# EAGLE board clock (EAGLE 5.10)

Size 100 x 80 mm. Coordinates in mm from the lower left corner, seen from the top.
Outline: 0,0 100,0 100,80 0,80 0,0
Copper layers (1*16): Top 0.035mm / dielectric 1.5mm / Bottom 0.035mm
Design rules "default": minimum track width 10mil, minimum drill 24mil, track to track 8mil, track to pad 8mil, pad to pad 8mil, via to via 8mil, smd to smd 8mil, copper to edge 40mil, drill to drill 8mil, minimum pad ring 10mil, minimum via ring 8mil, stop-mask expansion 4mil, vias tented up to drill 0mil, thermal gap 10mil

## Footprints (pad centres in the part's own frame; a part is rotated, then mirrored left to right if it is on the bottom)
BATTCON_12MM = smd 3.962 x 3.962: GND 0,0 | smd 3.175 x 3.175: PWR@1 -7.874,0; PWR@2 7.874,0
TQFP32-08 = smd 1.27 x 0.559: 1 -4.293,2.8; 2 -4.293,2; 3 -4.293,1.2; 4 -4.293,0.4; 5 -4.293,-0.4; 6 -4.293,-1.2; 7 -4.293,-2; 8 -4.293,-2.8; 17 4.293,-2.8; 18 4.293,-2; 19 4.293,-1.2; 20 4.293,-0.4; 21 4.293,0.4; 22 4.293,1.2; 23 4.293,2; 24 4.293,2.8 | smd 0.559 x 1.27: 9 -2.8,-4.293; 10 -2,-4.293; 11 -1.2,-4.293; 12 -0.4,-4.293; 13 0.4,-4.293; 14 1.2,-4.293; 15 2,-4.293; 16 2.8,-4.293; 25 2.8,4.293; 26 2,4.293; 27 1.2,4.293; 28 0.4,4.293; 29 -0.4,4.293; 30 -1.2,4.293; 31 -2,4.293; 32 -2.8,4.293
SO08 = smd 0.61 x 2.21: 1 -1.905,-2.616; 2 -0.635,-2.616; 3 0.635,-2.616; 4 1.905,-2.616; 5 1.905,2.616; 6 0.635,2.616; 7 -0.635,2.616; 8 -1.905,2.616
SO-08 = smd 0.6 x 2.2: 1 -1.905,-2.6; 2 -0.635,-2.6; 3 0.635,-2.6; 4 1.905,-2.6; 5 1.905,2.6; 6 0.635,2.6; 7 -0.635,2.6; 8 -1.905,2.6
CRYSTAL-32KHZ-SMD = smd 2.5 x 6: SHEILD 0,5.08 | smd 1 x 2.5: X1 -1.27,0; X2 1.27,0
0805 = smd 0.8 x 1.2: 1 -0.9,0; 2 0.9,0

## Placement (x,y rotation side)
BAT1  [BATTCON_12MM]  -22.86,20.32 0 top  (outside the outline)
IC1  AVR-MEGA8-AI  [TQFP32-08]  -17.78,7.62 0 top  (outside the outline)
IC2  DS1307  [SO08]  -25.4,30.48 0 top  (outside the outline)
IC3  MCP9803  [SO08]  -30.48,30.48 0 top  (outside the outline)
IC4  24C32  [SO-08]  -17.78,30.48 0 top  (outside the outline)
Q1  [CRYSTAL-32KHZ-SMD]  -35.56,15.24 0 top  (outside the outline)
R1  [0805]  -35.56,27.94 0 top  (outside the outline)
R2  [0805]  -15.24,35.56 0 top  (outside the outline)
R3  [0805]  -19.05,35.56 0 top  (outside the outline)

## Library data of the parts
BAT1 IC1-IC4 Q1 R1-R3 = clock

## Nets
+5V: IC1.4 IC1.6 IC1.18 IC1.20 IC2.8 IC3.8 IC4.8 R1.2 R2.2 R3.2
GND: BAT1.GND IC1.3 IC1.5 IC1.21 IC2.4 IC3.4 IC4.4
N$1: BAT1.PWR@1 IC2.3
N$2: IC2.2 Q1.X1
N$3: IC2.1 Q1.X2
N$4: IC1.29 R3.1
SCL: IC1.28 IC2.6 IC3.2 IC4.6 R1.1
SDA: IC1.27 IC2.5 IC3.1 IC4.5 R2.1

## Tracks (layer width: path | path; a pad name or v marks a point on that pad's centre or on a via)
+5V  (9 unrouted)
GND  (6 unrouted)
N$1  (1 unrouted)
N$2  (1 unrouted)
N$3  (1 unrouted)
N$4  (1 unrouted)
SCL  (4 unrouted)
SDA  (4 unrouted)